# Altium PCB ETL_RB.PcbDoc
Units mm, origin at the board's own origin, x right, y up, seen from the top; angles counter-clockwise.
Board outline 304.7 x 56.5 mm, 2 copper layers (Top Layer, Bottom Layer), stack 0.761 mm thick; 15 components, 0 nets, 656 pads, 28 vias.
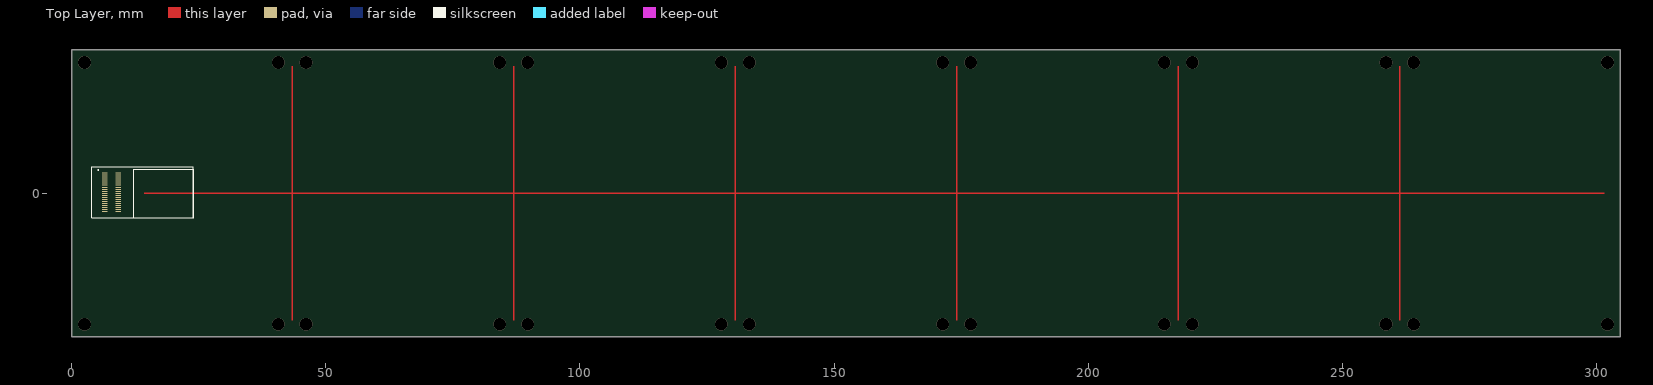
[diagram p0: Top Layer view]
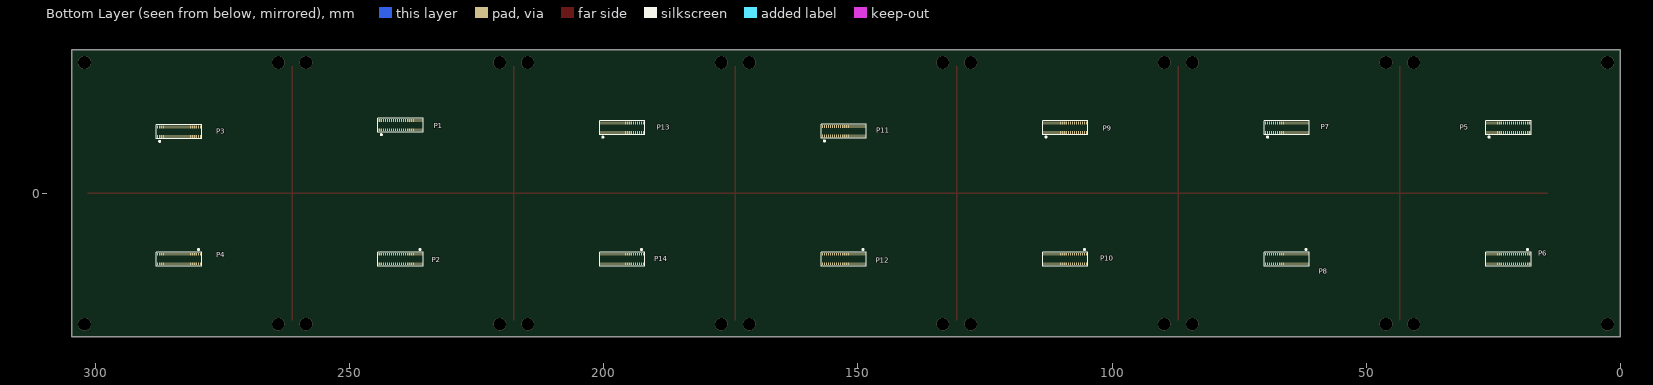
[diagram p1: Bottom Layer view, seen from below]

## Layer stack, top to bottom
Top Solder: solder mask 0.0178, Solder Resist, Dk 4.1
Top Layer: signal copper 0.0175
Dielectric 1: prepreg 0.0691, 1080, Dk 3.4
Dielectric 2: core 0.1016, TU-863, Dk 3.7
Dielectric 3: prepreg 0.1417, 1080, Dk 3.4
Dielectric 4: core 0.1016, TU-863, Dk 3.7
Dielectric 5: prepreg 0.1417, 1080, Dk 3.4
Dielectric 6: core 0.1016, TU-863, Dk 3.7
Dielectric 7: prepreg 0.0691, 1080, Dk 3.4
Bottom Layer: signal copper 0.0175
Bottom Solder: solder mask 0.0178, Solder Resist, Dk 4.1

## Board outline
0,-28.25 0,28.25 81.95,28.25 304.7,28.25 304.7,-28.25 91.95,-28.25 48.35,-28.25 38.35,-28.25

## Design rules (kind name [scope] priority, off if disabled: settings)
Clearance [All] p1: gap=0.076 ignorepadtopadclearanceinfootprint=FALSE except(0: Arc-Hole Track-Hole SMDPad-Hole THPad-Hole Via-Hole Fill-Hole Poly-Hole Region-Hole Text-Hole)
Height [All] p1 off: minheight=0 maxheight=25.4 prefheight=12.7
HoleToHoleClearance HoleToHoleClearance_1 [InNet('GND') or InNet('LV_RB') or InNet('1V5A') or InNet('1V5D') or InNet('1V2A') or InNet('1V2B') or InNet('1V2C') or InNet('1V2D') vs InNet('GND') or InNet('LV_RB') or InNet('1V5A') or InNet('1V5D') or InNet('1V2A') or InNet('1V2B') or InNet('1V2C') or InNet('1V2D')] p1: gap=0.15 allowstackedmicrovias=TRUE
HoleToHoleClearance [All] p2: gap=0.254 allowstackedmicrovias=TRUE
MinimumSolderMaskSliver [All] p1: minsoldermaskwidth=0.102
PlaneClearance PlaneClearance_1 [InNetClass('BV')] p1: clearance=0.508
PlaneClearance [All] p2: clearance=0.152
PlaneConnect PlaneConnect_1 [All] p1: planeconnectstyle=Direct reliefexpansion=0.508 reliefentries=4 reliefconductorwidth=0.254 reliefairgap=0.254
PolygonConnect [All] p1: connectstyle=Relief reliefconductorwidth=0.254 reliefentries=4 polygonreliefangle="90 Angle" airgapwidth=0.254
RoutingVias [All] p1: holewidth=0.25 width=0.4 viastyle="Through Hole" minholewidth=0.15 minwidth=0.25 maxholewidth=0.711 maxwidth=1.27
SilkToSilkClearance [All] p1: silktosilkclearance=0.025
SilkToSolderMaskClearance [IsPad] p1: minsilkscreentomaskgap=0.025 clearancetoexposedcopper=TRUE
SolderMaskExpansion SolderMaskExpansion_1 [InPadClass('WP7B40PAD')] p1: expansion=0.038 istentingtop=FALSE
SolderMaskExpansion [All] p2: expansion=0.051 istentingtop=FALSE
Width Width_HS [InNetClass('HS')] p1: maxlimit=0.13 minlimit=0.076 preferedwidth=0.12 bottomlayer_minwidth=0.12 bottomlayer_maxwidth=0.12 minimp=50.000000 maximp=50.000000 favimp=50.000000 // impedance controlled signals
Width [All] p2: maxlimit=2.54 minlimit=0.076 preferedwidth=0.12 toplayer_minwidth=0.076 minimp=50.000000 maximp=50.000000 favimp=50.000000
23 further rules are at their usual default settings.

## Classes and differential pairs
pad class WP7B40PAD: P5-1 P5-2 P5-3 P5-4 P5-5 P5-6 P5-7 P5-8 P5-9 P5-10 P5-11 P5-12 P5-13 P5-14 P5-15 P5-16 P5-17 P5-18 P5-19 P5-20 P5-21 P5-22 P5-23 P5-24 P5-25 P5-26 P5-27 P5-28 P5-29 P5-30 P5-31 P5-32 P5-33 P5-34 P5-35 P5-36 P5-37 P5-38 P5-39 P5-40 P5-41 P5-42 P5-43 P5-44 P6-1 P6-2 P6-3 P6-4 P6-5 P6-6 P6-7 P6-8 P6-9 P6-10 P6-11 P6-12 P6-13 P6-14 P6-15 P6-16 P6-17 P6-18 P6-19 P6-20 P6-21 P6-22 P6-23 P6-24 P6-25 P6-26 P6-27 P6-28 P6-29 P6-30 P6-31 P6-32 P6-33 P6-34 P6-35 P6-36 P6-37 P6-38 P6-39 P6-40 P6-41 P6-42 P6-43 P6-44 P7-1 P7-2 P7-3 P7-4 P7-5 P7-6 P7-7 P7-8 P7-9 P7-10 P7-11 P7-12 P7-13 P7-14 P7-15 P7-16 P7-17 P7-18 P7-19 P7-20 P7-21 P7-22 P7-23 P7-24 P7-25 P7-26 P7-27 P7-28 P7-29 P7-30 P7-31 P7-32 P7-33 P7-34 P7-35 P7-36 P7-37 P7-38 P7-39 P7-40 P7-41 P7-42 P7-43 P7-44 P8-1 P8-2 P8-3 P8-4 P8-5 P8-6 P8-7 P8-8 P8-9 P8-10 P8-11 P8-12 P8-13 P8-14 P8-15 P8-16 P8-17 P8-18 P8-19 P8-20 P8-21 P8-22 P8-23 P8-24 P8-25 P8-26 P8-27 P8-28 P8-29 P8-30 P8-31 P8-32 P8-33 P8-34 P8-35 P8-36 P8-37 P8-38 P8-39 P8-40 P8-41 P8-42 P8-43 P8-44 P9-1 P9-2 P9-3 P9-4 P9-5 P9-6 P9-7 P9-8 P9-9 P9-10 P9-11 P9-12 P9-13 P9-14 P9-15 P9-16 P9-17 P9-18 P9-19 P9-20 P9-21 P9-22 P9-23 P9-24 P9-25 P9-26 P9-27 P9-28 P9-29 P9-30 P9-31 P9-32 P9-33 P9-34 P9-35 P9-36 P9-37 P9-38 P9-39 P9-40 P9-41 P9-42 P9-43 P9-44 P10-1 P10-2 P10-3 P10-4 P10-5 P10-6 P10-7 P10-8 P10-9 P10-10 P10-11 P10-12 P10-13 P10-14 P10-15 P10-16 P10-17 P10-18 P10-19 P10-20 P10-21 P10-22 P10-23 P10-24 P10-25 P10-26 P10-27 P10-28 P10-29 P10-30 P10-31 P10-32 P10-33 P10-34 P10-35 P10-36 P10-37 P10-38 P10-39 P10-40 P10-41 P10-42 P10-43 P10-44
component class ETL_RB: P5 P6 P7 P8 P9 P10

## Components (designator, comment, footprint, x,y, rotation, side; value= is the part's Value field where it differs from the comment)
P1 "WP7B-P040VA1" wp7b-40p 243.8,12.5 r180 bottom
P2 "WP7B-P040VA1" wp7b-40p 236.2,-12 r0 bottom
P3 "WP7B-P040VA1" wp7b-40p 287.4,11.2 r180 bottom
P4 "WP7B-P040VA1" wp7b-40p 279.8,-12 r0 bottom
P5 "WP7B-P040VA1" WP7B-40P 25.8,12 r180 bottom locked
P6 "WP7B-P040VA1" WP7B-40P 18.2,-12 r0 bottom locked
P7 "WP7B-P040VA1" WP7B-40P 69.4,12 r180 bottom locked
P8 "WP7B-P040VA1" WP7B-40P 61.8,-12 r0 bottom locked
P9 "WP7B-P040VA1" WP7B-40P 113,12 r180 bottom locked
P10 "WP7B-P040VA1" WP7B-40P 105.4,-12 r0 bottom locked
P11 "WP7B-P040VA1" wp7b-40p 156.6,11.285 r180 bottom
P12 "WP7B-P040VA1" wp7b-40p 149,-12 r0 bottom
P13 "WP7B-P040VA1" wp7b-40p 200.2,12 r180 bottom
P14 "WP7B-P040VA1" wp7b-40p 192.6,-12 r0 bottom
? "DF40C-40DS-0.4V" vtrx+ 6.5,4 r270 top

## Footprints (in the part's own frame and the unit in brackets; to place one, negate y for a bottom-side part, rotate by r counter-clockwise, add the part's x,y. Pads: shape width x height; smd on the part's side, far side on the other; paste and mask are expansions set on the pad)
vtrx+ [mm]
  rect 0.2x1.12 smd: 1(0,0) 2(0,2.66) 3(0.4,0) 4(0.4,2.66) 5(0.8,0) 6(0.8,2.66) 7(1.2,0) 8(1.2,2.66) 9(1.6,0) 10(1.6,2.66) 11(2,0) 12(2,2.66) 13(2.4,0) 14(2.4,2.66) 15(2.8,0) 16(2.8,2.66) 17(3.2,0) 18(3.2,2.66) 19(3.6,0) 20(3.6,2.66) 21(4,0) 22(4,2.66) 23(4.4,0) 24(4.4,2.66) 25(4.8,0) 26(4.8,2.66) 27(5.2,0) 28(5.2,2.66) 29(5.6,0) 30(5.6,2.66) 31(6,0) 32(6,2.66) 33(6.4,0) 34(6.4,2.66) 35(6.8,0) 36(6.8,2.66) 37(7.2,0) 38(7.2,2.66) 39(7.6,0) 40(7.6,2.66)
  silkscreen extent -1.2,-2.6 8.8,17.4, body extent -1.2,-2.6 8.8,17.4, height 2
wp7b-40p [mm]
  rect 0.22x0.55 smd: 1(0,0) 2(0.4,0) 3(0.8,0) 4(1.2,0) 5(1.6,0) 6(2,0) 7(2.4,0) 8(2.8,0) 9(3.2,0) 10(3.6,0) 11(4,0) 12(4.4,0) 13(4.8,0) 14(5.2,0) 15(5.6,0) 16(6,0) 17(6.4,0) 18(6.8,0) 19(7.2,0) 20(7.6,0) 21(7.6,1.85) 22(7.2,1.85) 23(6.8,1.85) 24(6.4,1.85) 25(6,1.85) 26(5.6,1.85) 27(5.2,1.85) 28(4.8,1.85) 29(4.4,1.85) 30(4,1.85) 31(3.6,1.85) 32(3.2,1.85) 33(2.8,1.85) 34(2.4,1.85) 35(2,1.85) 36(1.6,1.85) 37(1.2,1.85) 38(0.8,1.85) 39(0.4,1.85) 40(0,1.85) 41(-0.4,0) 42(8,0) 43(8,1.85) 44(-0.4,1.85)
  silkscreen extent -0.65,-1 8.25,2.3, body extent -1.5,-0.32 9.1,2.17, height 0.5
WP7B-40P [mm]
  rect 0.22x0.55 smd: 1(0,0) 2(0.4,0) 3(0.8,0) 4(1.2,0) 5(1.6,0) 6(2,0) 7(2.4,0) 8(2.8,0) 9(3.2,0) 10(3.6,0) 11(4,0) 12(4.4,0) 13(4.8,0) 14(5.2,0) 15(5.6,0) 16(6,0) 17(6.4,0) 18(6.8,0) 19(7.2,0) 20(7.6,0) 21(7.6,1.85) 22(7.2,1.85) 23(6.8,1.85) 24(6.4,1.85) 25(6,1.85) 26(5.6,1.85) 27(5.2,1.85) 28(4.8,1.85) 29(4.4,1.85) 30(4,1.85) 31(3.6,1.85) 32(3.2,1.85) 33(2.8,1.85) 34(2.4,1.85) 35(2,1.85) 36(1.6,1.85) 37(1.2,1.85) 38(0.8,1.85) 39(0.4,1.85) 40(0,1.85) 41(-0.4,0) 42(8,0) 43(8,1.85) 44(-0.4,1.85)
  silkscreen extent -0.65,-1 8.25,2.3, body extent -1.5,-0.32 9.1,2.17, height 0.5

## Part data
P1 P2 P3 P4 P5 P6 P7 P8 P9 P10 P11 P12 P13 P14: library part WP7B-40P, "plug"
?: library part VTRX+_DF40C-2.0-40DS-0.4V, "VTRX+ module with 2.5mm stack Height.", Parameter 1=VTRX+

## Via types
v1: diameter 2.5, hole 2.5, Top Layer to Bottom Layer, 28 vias

## Nets (pads, with @x,y where several pads share a name; then routed paths per layer and width w, separated by ;. In a path a pad name is that pad's centre, name@x,y a point inside that pad or via, vN(x,y) a via of type N, cw(c..) or ccw(c..) an arc to the next point about the centre after c; other vN are vias at no path point)
pads on no net: ?.1 ?.2 ?.3 ?.4 ?.5 ?.6 ?.7 ?.8 ?.9 ?.10 ?.11 ?.12 ?.13 ?.14 ?.15 ?.16 ?.17 ?.18 ?.19 ?.20 ?.21 ?.22 ?.23 ?.24 ?.25 ?.26 ?.27 ?.28 ?.29 ?.30 ?.31 ?.32 ?.33 ?.34 ?.35 ?.36 ?.37 ?.38 ?.39 ?.40 P1.1 P1.2 P1.3 P1.4 P1.5 P1.6 P1.7 P1.8 P1.9 P1.10 P1.11 P1.12 P1.13 P1.14 P1.15 P1.16 P1.17 P1.18 P1.19 P1.20 P1.21 P1.22 P1.23 P1.24 P1.25 P1.26 P1.27 P1.28 P1.29 P1.30 P1.31 P1.32 P1.33 P1.34 P1.35 P1.36 P1.37 P1.38 P1.39 P1.40 P1.41 P1.42 P1.43 P1.44 P2.1 P2.2 P2.3 P2.4 P2.5 P2.6 P2.7 P2.8 P2.9 P2.10 P2.11 P2.12 P2.13 P2.14 P2.15 P2.16 P2.17 P2.18 P2.19 P2.20 P2.21 P2.22 P2.23 P2.24 P2.25 P2.26 P2.27 P2.28 P2.29 P2.30 P2.31 P2.32 P2.33 P2.34 P2.35 P2.36 P2.37 P2.38 P2.39 P2.40 P2.41 P2.42 P2.43 P2.44 P3.1 P3.2 P3.3 P3.4 P3.5 P3.6 P3.7 P3.8 P3.9 P3.10 P3.11 P3.12 P3.13 P3.14 P3.15 P3.16 P3.17 P3.18 P3.19 P3.20 P3.21 P3.22 P3.23 P3.24 P3.25 P3.26 P3.27 P3.28 P3.29 P3.30 P3.31 P3.32 P3.33 P3.34 P3.35 P3.36 P3.37 P3.38 P3.39 P3.40 P3.41 P3.42 P3.43 P3.44 P4.1 P4.2 P4.3 P4.4 P4.5 P4.6 P4.7 P4.8 P4.9 P4.10 P4.11 P4.12 P4.13 P4.14 P4.15 P4.16 P4.17 P4.18 P4.19 P4.20 P4.21 P4.22 P4.23 P4.24 P4.25 P4.26 P4.27 P4.28 P4.29 P4.30 P4.31 P4.32 P4.33 P4.34 P4.35 P4.36 P4.37 P4.38 P4.39 P4.40 P4.41 P4.42 P4.43 P4.44 P5.1 P5.2 P5.3 P5.4 P5.5 P5.6 P5.7 P5.8 P5.9 P5.10 P5.11 P5.12 P5.13 P5.14 P5.15 P5.16 P5.17 P5.18 P5.19 P5.20 P5.21 P5.22 P5.23 P5.24 P5.25 P5.26 P5.27 P5.28 P5.29 P5.30 P5.31 P5.32 P5.33 P5.34 P5.35 P5.36 P5.37 P5.38 P5.39 P5.40 P5.41 P5.42 P5.43 P5.44 P6.1 P6.2 P6.3 P6.4 P6.5 P6.6 P6.7 P6.8 P6.9 P6.10 P6.11 P6.12 P6.13 P6.14 P6.15 P6.16 P6.17 P6.18 P6.19 P6.20 P6.21 P6.22 P6.23 P6.24 P6.25 P6.26 P6.27 P6.28 P6.29 P6.30 P6.31 P6.32 P6.33 P6.34 P6.35 P6.36 P6.37 P6.38 P6.39 P6.40 P6.41 P6.42 P6.43 P6.44 P7.1 P7.2 P7.3 P7.4 P7.5 P7.6 P7.7 P7.8 P7.9 P7.10 P7.11 P7.12 P7.13 P7.14 P7.15 P7.16 P7.17 P7.18 P7.19 P7.20 P7.21 P7.22 P7.23 P7.24 P7.25 P7.26 P7.27 P7.28 P7.29 P7.30 P7.31 P7.32 P7.33 P7.34 P7.35 P7.36 P7.37 P7.38 P7.39 P7.40 P7.41 P7.42 P7.43 P7.44 P8.1 P8.2 P8.3 P8.4 P8.5 P8.6 P8.7 P8.8 P8.9 P8.10 P8.11 P8.12 P8.13 P8.14 P8.15 P8.16 P8.17 P8.18 P8.19 P8.20 P8.21 P8.22 P8.23 P8.24 P8.25 P8.26 P8.27 P8.28 P8.29 P8.30 P8.31 P8.32 P8.33 P8.34 P8.35 P8.36 P8.37 P8.38 P8.39 P8.40 P8.41 P8.42 P8.43 P8.44 P9.1 P9.2 P9.3 P9.4 P9.5 P9.6 P9.7 P9.8 P9.9 P9.10 P9.11 P9.12 P9.13 P9.14 P9.15 P9.16 P9.17 P9.18 P9.19 P9.20 P9.21 P9.22 P9.23 P9.24 P9.25 P9.26 P9.27 P9.28 P9.29 P9.30 P9.31 P9.32 P9.33 P9.34 P9.35 P9.36 P9.37 P9.38 P9.39 P9.40 P9.41 P9.42 P9.43 P9.44 P10.1 P10.2 P10.3 P10.4 P10.5 P10.6 P10.7 P10.8 P10.9 P10.10 P10.11 P10.12 P10.13 P10.14 P10.15 P10.16 P10.17 P10.18 P10.19 P10.20 P10.21 P10.22 P10.23 P10.24 P10.25 P10.26 P10.27 P10.28 P10.29 P10.30 P10.31 P10.32 P10.33 P10.34 P10.35 P10.36 P10.37 P10.38 P10.39 P10.40 P10.41 P10.42 P10.43 P10.44 P11.1 P11.2 P11.3 P11.4 P11.5 P11.6 P11.7 P11.8 P11.9 P11.10 P11.11 P11.12 P11.13 P11.14 P11.15 P11.16 P11.17 P11.18 P11.19 P11.20 P11.21 P11.22 P11.23 P11.24 P11.25 P11.26 P11.27 P11.28 P11.29 P11.30 P11.31 P11.32 P11.33 P11.34 P11.35 P11.36 P11.37 P11.38 P11.39 P11.40 P11.41 P11.42 P11.43 P11.44 P12.1 P12.2 P12.3 P12.4 P12.5 P12.6 P12.7 P12.8 P12.9 P12.10 P12.11 P12.12 P12.13 P12.14 P12.15 P12.16 P12.17 P12.18 P12.19 P12.20 P12.21 P12.22 P12.23 P12.24 P12.25 P12.26 P12.27 P12.28 P12.29 P12.30 P12.31 P12.32 P12.33 P12.34 P12.35 P12.36 P12.37 P12.38 P12.39 P12.40 P12.41 P12.42 P12.43 P12.44 P13.1 P13.2 P13.3 P13.4 P13.5 P13.6 P13.7 P13.8 P13.9 P13.10 P13.11 P13.12 P13.13 P13.14 P13.15 P13.16 P13.17 P13.18 P13.19 P13.20 P13.21 P13.22 P13.23 P13.24 P13.25 P13.26 P13.27 P13.28 P13.29 P13.30 P13.31 P13.32 P13.33 P13.34 P13.35 P13.36 P13.37 P13.38 P13.39 P13.40 P13.41 P13.42 P13.43 P13.44 P14.1 P14.2 P14.3 P14.4 P14.5 P14.6 P14.7 P14.8 P14.9 P14.10 P14.11 P14.12 P14.13 P14.14 P14.15 P14.16 P14.17 P14.18 P14.19 P14.20 P14.21 P14.22 P14.23 P14.24 P14.25 P14.26 P14.27 P14.28 P14.29 P14.30 P14.31 P14.32 P14.33 P14.34 P14.35 P14.36 P14.37 P14.38 P14.39 P14.40 P14.41 P14.42 P14.43 P14.44
copper on no net: | length 587.3
  Top Layer w0.254: 14.3,0 301.6,0 ; 43.35,-25 43.35,25 ; 86.95,-25 86.95,25 ; 130.55,-25 130.55,25 ; 174.15,-25 174.15,25 ; 217.75,-25 217.75,25 ; 261.35,-25 261.35,25
  other v1: 2.5,-25.75 40.6,-25.75 46.1,-25.75 84.2,-25.75 89.7,-25.75 127.8,-25.75 133.3,-25.75 171.4,-25.75 176.9,-25.75 215,-25.75 220.5,-25.75 258.6,-25.75 264.1,-25.75 302.2,-25.75 2.5,25.75 40.6,25.75 46.1,25.75 84.2,25.75 89.7,25.75 127.8,25.75 133.3,25.75 171.4,25.75 176.9,25.75 215,25.75 220.5,25.75 258.6,25.75 264.1,25.75 302.2,25.75

## Silkscreen, mask and mechanical layers (free items; w line width, h text height)
Top Overlay:
  lines w0.102: 12.15,-4.75 24,-4.75 24,4.75 12.15,4.75 12.15,-4.75
Mechanical 14:
  lines w0.15: 0,-28.25 304.7,-28.25 304.7,28.25 0,28.25 0,-28.25 ; 13.45,-4 ccw(c14.45,-4) 14.45,-5 28.65,-5 ccw(c28.65,-4) 29.65,-4 29.65,4 ccw(c28.65,4) 28.65,5 14.45,5 ccw(c14.45,4) 13.45,4 13.45,-4 ; 57.05,-4 ccw(c58.05,-4) 58.05,-5 72.25,-5 ccw(c72.25,-4) 73.25,-4 73.25,4 ccw(c72.25,4) 72.25,5 58.05,5 ccw(c58.05,4) 57.05,4 57.05,-4 ; 100.65,-4 ccw(c101.65,-4) 101.65,-5 115.85,-5 ccw(c115.85,-4) 116.85,-4 116.85,4 ccw(c115.85,4) 115.85,5 101.65,5 ccw(c101.65,4) 100.65,4 100.65,-4 ; 144.25,-4 ccw(c145.25,-4) 145.25,-5 159.45,-5 ccw(c159.45,-4) 160.45,-4 160.45,4 ccw(c159.45,4) 159.45,5 145.25,5 ccw(c145.25,4) 144.25,4 144.25,-4 ; 187.85,-4 ccw(c188.85,-4) 188.85,-5 203.05,-5 ccw(c203.05,-4) 204.05,-4 204.05,4 ccw(c203.05,4) 203.05,5 188.85,5 ccw(c188.85,4) 187.85,4 187.85,-4 ; 231.45,-4 ccw(c232.45,-4) 232.45,-5 246.65,-5 ccw(c246.65,-4) 247.65,-4 247.65,4 ccw(c246.65,4) 246.65,5 232.45,5 ccw(c232.45,4) 231.45,4 231.45,-4 ; 275.05,-4 ccw(c276.05,-4) 276.05,-5 290.25,-5 ccw(c290.25,-4) 291.25,-4 291.25,4 ccw(c290.25,4) 290.25,5 276.05,5 ccw(c276.05,4) 275.05,4 275.05,-4
  text "CUTOUT" at 17.522,-0.754 h1.5
  text "CUTOUT" at 61.055,-0.754 h1.5
  text "CUTOUT" at 104.589,-0.754 h1.5
  text "CUTOUT" at 148.122,-0.754 h1.5
  text "CUTOUT" at 191.655,-0.754 h1.5
  text "CUTOUT" at 235.189,-0.754 h1.5
  text "CUTOUT" at 278.722,-0.754 h1.5